# Altium PCB CSC_TEMP.PcbDoc
Units mm, origin at the board's own origin, x right, y up, seen from the top; angles counter-clockwise.
Board outline 1056.64 x 614.68 mm, 2 copper layers (Top Layer, Bottom Layer); 145 components, 556 nets, 1243 pads, 137 vias.
Unrouted connection lines stored in the file: 379.
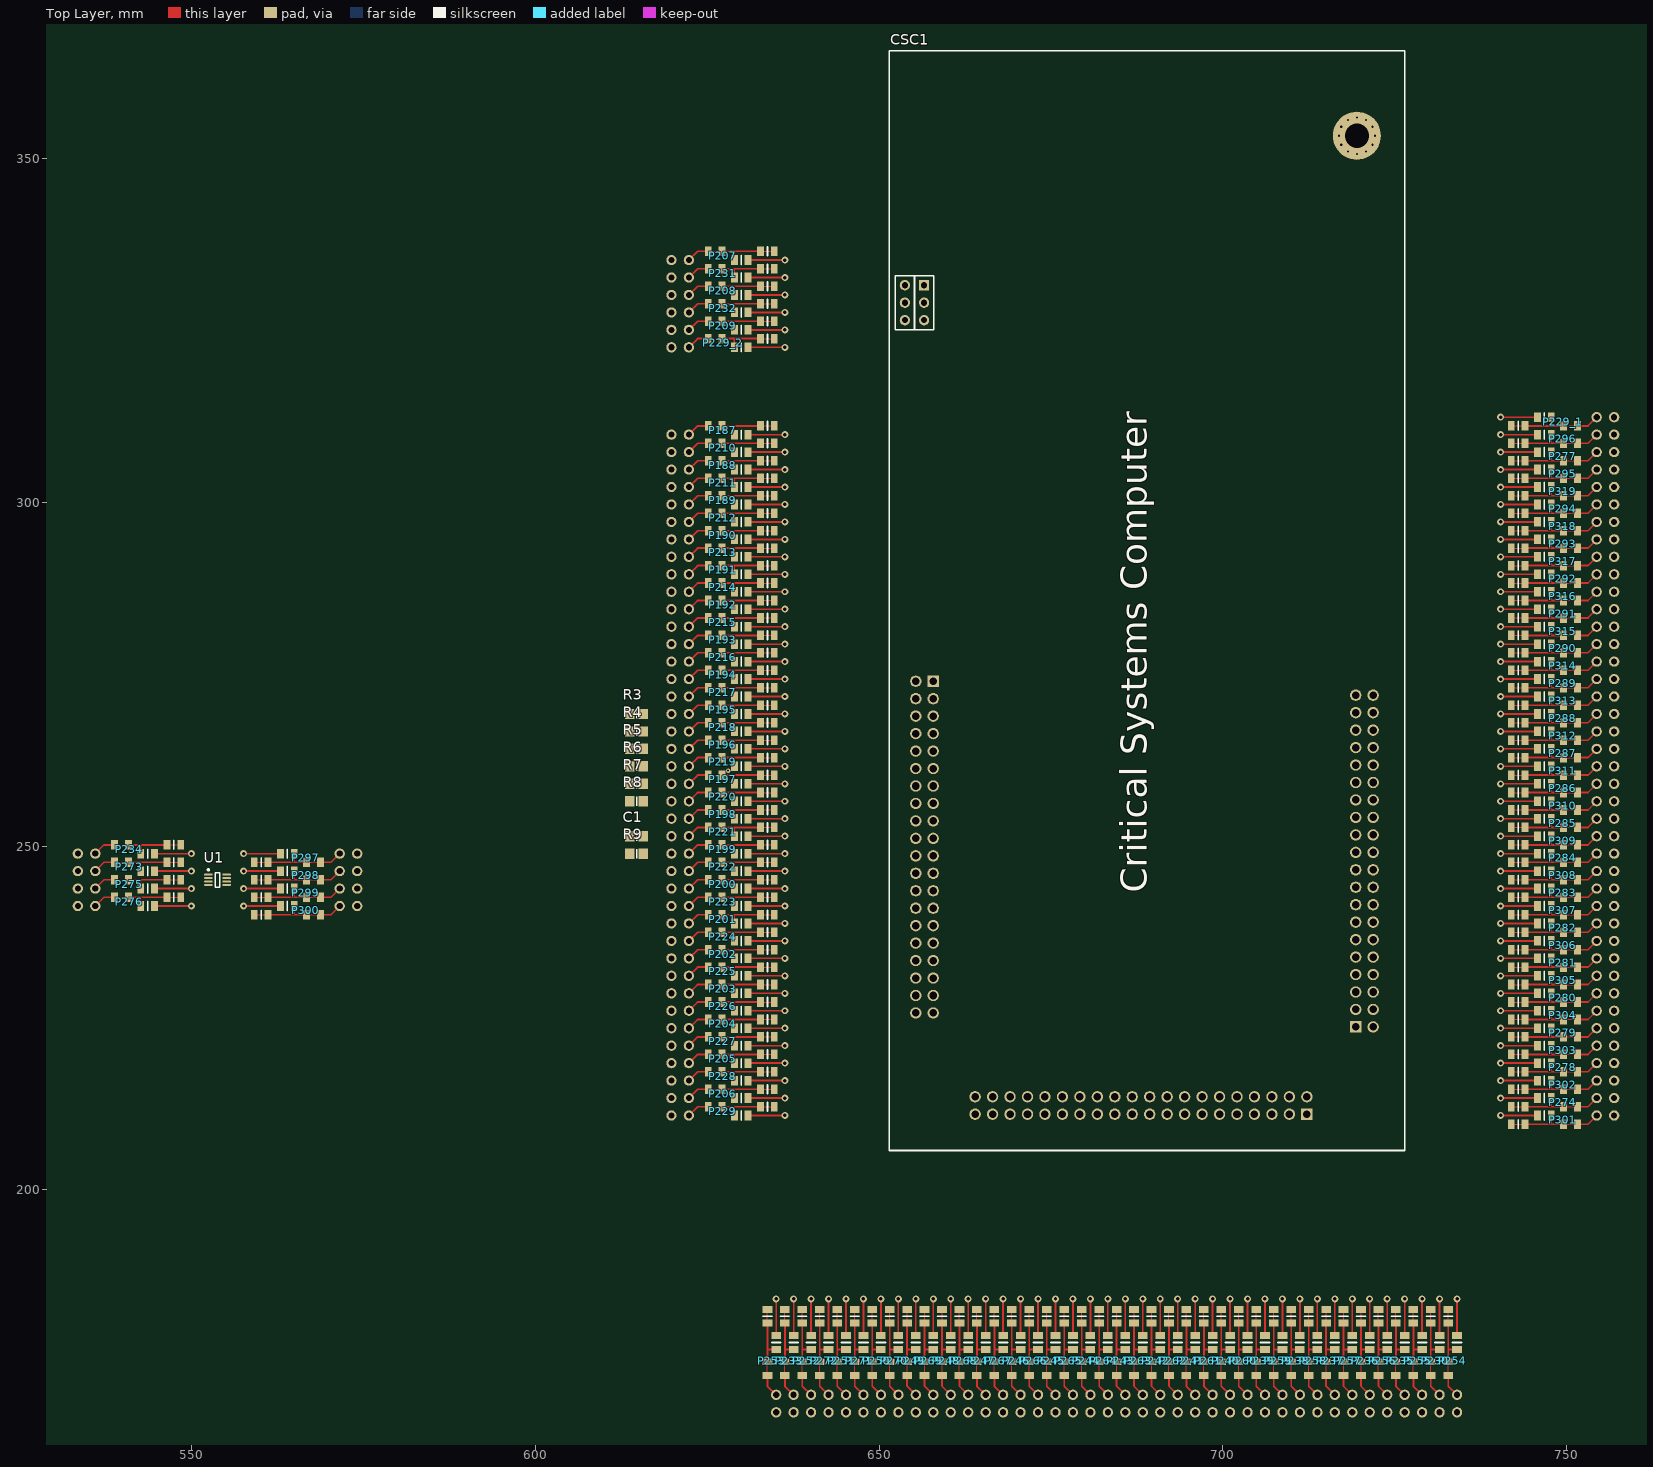
[diagram p0: Top Layer view]
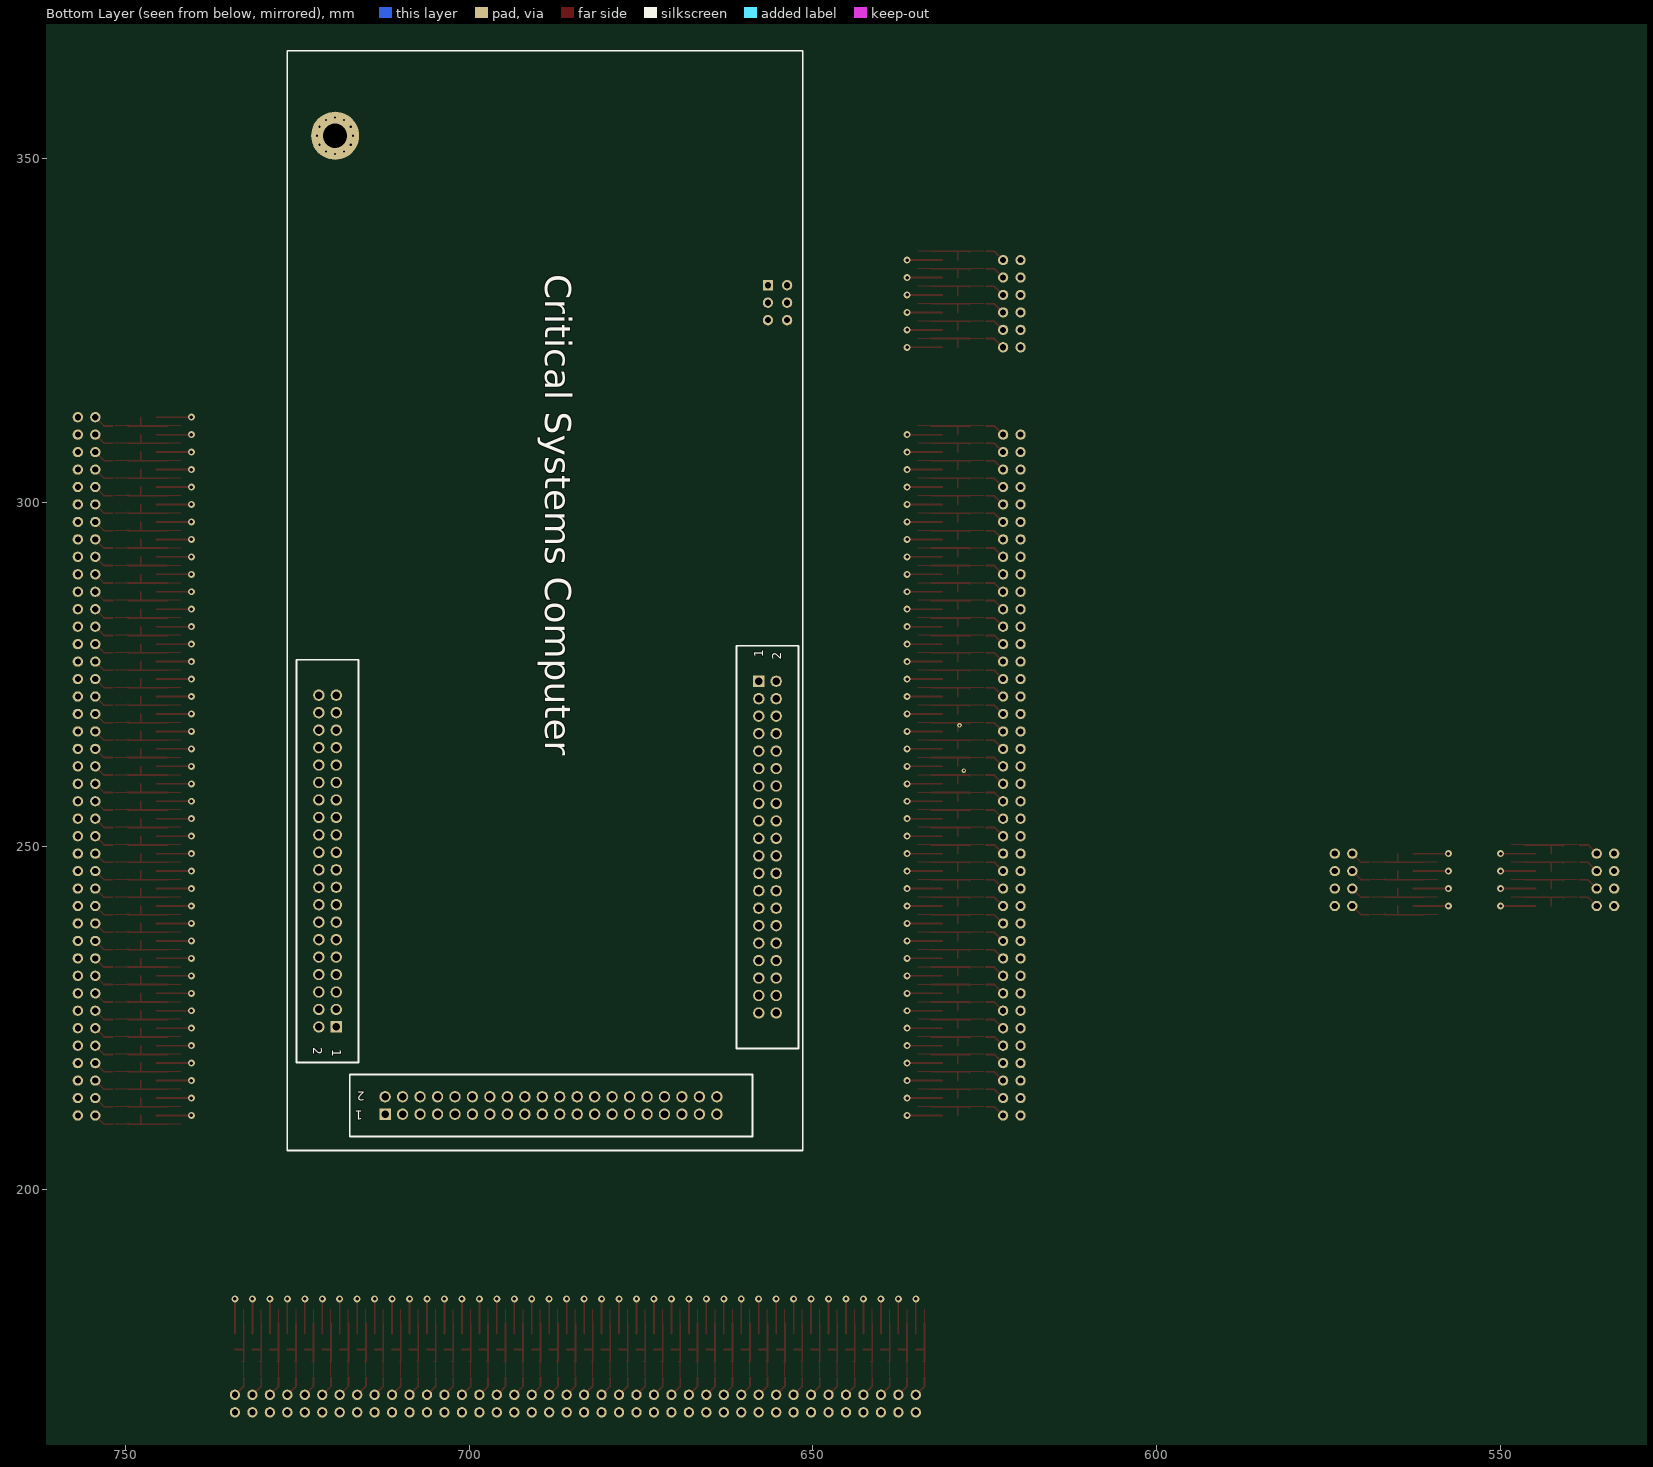
[diagram p1: Bottom Layer view, seen from below]

## Layer stack, top to bottom
Top Layer: signal copper 0.0356
Dielectric: dielectric 0.32, FR-4, Dk 4.8
Bottom Layer: signal copper 0.0356

## Board outline
0,0 0,614.68 1051.56,614.68 1056.64,609.6 1056.64,0

## Design rules (kind name [scope] priority, off if disabled: settings)
Clearance [All] p1: gap=0.152
HoleSize [All] p1: absolutevalues=TRUE maxlimit=3.5 minlimit=0.025 maxpercent=80.000 minpercent=20.000
PolygonConnect [All] p1: connectstyle=Relief reliefconductorwidth=0.254 reliefentries=4 polygonreliefangle="90 Angle"
RoomDefinition CSC [InComponentClass('CSC')] p1: confinementstyle=ConfineIn formatcopy=TRUE lockcomponents=FALSE outline 0,0 50.8,0 50.8,25.4 0,25.4
RoutingVias [All] p1: holewidth=0.711 width=1.27 viastyle="Through Hole" minholewidth=0.711 minwidth=1.27 maxholewidth=0.711 maxwidth=1.27
SilkscreenOverComponentPads [All] p1: minsilkscreentomaskgap=0.254
SolderMaskExpansion [All] p1: expansion=0.102
Width [All] p1: maxlimit=0.254 minlimit=0.254 preferedwidth=0.254
26 further rules are at their usual default settings.

## Components (designator, comment, footprint, x,y, rotation, side; value= is the part's Value field where it differs from the comment)
C1 "0805 Cap" 6-0805_M 614.68,251.46 r180 top
CSC1 "Critical Systems Computer" CSC 726.44,205.74 r90 top
P187 "Jumper_Filter" Jumper_filter 619.76,309.88 r0 top
P188 "Jumper_Filter" Jumper_filter 619.76,304.8 r0 top
P189 "Jumper_Filter" Jumper_filter 619.76,299.72 r0 top
P190 "Jumper_Filter" Jumper_filter 619.76,294.64 r0 top
P191 "Jumper_Filter" Jumper_filter 619.76,289.56 r0 top
P192 "Jumper_Filter" Jumper_filter 619.76,284.48 r0 top
P193 "Jumper_Filter" Jumper_filter 619.76,279.4 r0 top
P194 "Jumper_Filter" Jumper_filter 619.76,274.32 r0 top
P195 "Jumper_Filter" Jumper_filter 619.76,269.24 r0 top
P196 "Jumper_Filter" Jumper_filter 619.76,264.16 r0 top
P197 "Jumper_Filter" Jumper_filter 619.76,259.08 r0 top
P198 "Jumper_Filter" Jumper_filter 619.76,254 r0 top
P199 "Jumper_Filter" Jumper_filter 619.76,248.92 r0 top
P200 "Jumper_Filter" Jumper_filter 619.76,243.84 r0 top
P201 "Jumper_Filter" Jumper_filter 619.76,238.76 r0 top
P202 "Jumper_Filter" Jumper_filter 619.76,233.68 r0 top
P203 "Jumper_Filter" Jumper_filter 619.76,228.6 r0 top
P204 "Jumper_Filter" Jumper_filter 619.76,223.52 r0 top
P205 "Jumper_Filter" Jumper_filter 619.76,218.44 r0 top
P206 "Jumper_Filter" Jumper_filter 619.76,213.36 r0 top
P207 "Jumper_Filter" Jumper_filter 619.76,335.28 r0 top
P208 "Jumper_Filter" Jumper_filter 619.76,330.2 r0 top
P209 "Jumper_Filter" Jumper_filter 619.76,325.12 r0 top
P210 "Jumper_Filter" Jumper_filter 619.76,307.34 r0 top
P211 "Jumper_Filter" Jumper_filter 619.76,302.26 r0 top
P212 "Jumper_Filter" Jumper_filter 619.76,297.18 r0 top
P213 "Jumper_Filter" Jumper_filter 619.76,292.1 r0 top
P214 "Jumper_Filter" Jumper_filter 619.76,287.02 r0 top
P215 "Jumper_Filter" Jumper_filter 619.76,281.94 r0 top
P216 "Jumper_Filter" Jumper_filter 619.76,276.86 r0 top
P217 "Jumper_Filter" Jumper_filter 619.76,271.78 r0 top
P218 "Jumper_Filter" Jumper_filter 619.76,266.7 r0 top
P219 "Jumper_Filter" Jumper_filter 619.76,261.62 r0 top
P220 "Jumper_Filter" Jumper_filter 619.76,256.54 r0 top
P221 "Jumper_Filter" Jumper_filter 619.76,251.46 r0 top
P222 "Jumper_Filter" Jumper_filter 619.76,246.38 r0 top
P223 "Jumper_Filter" Jumper_filter 619.76,241.3 r0 top
P224 "Jumper_Filter" Jumper_filter 619.76,236.22 r0 top
P225 "Jumper_Filter" Jumper_filter 619.76,231.14 r0 top
P226 "Jumper_Filter" Jumper_filter 619.76,226.06 r0 top
P227 "Jumper_Filter" Jumper_filter 619.76,220.98 r0 top
P228 "Jumper_Filter" Jumper_filter 619.76,215.9 r0 top
P229 "Jumper_Filter" Jumper_filter 619.76,210.82 r0 top
P229_1 "Jumper_Filter" Jumper_filter 756.92,312.42 r180 top
P229_2 "Jumper_Filter" Jumper_filter 619.76,322.58 r0 top
P230 "Jumper_Filter" Jumper_filter 731.52,167.64 r90 top
P231 "Jumper_Filter" Jumper_filter 619.76,332.74 r0 top
P232 "Jumper_Filter" Jumper_filter 619.76,327.66 r0 top
P233 "Jumper_Filter" Jumper_filter 637.54,167.64 r90 top
P234 "Jumper_Filter" Jumper_filter 533.4,248.92 r0 top
P235 "Jumper_Filter" Jumper_filter 726.44,167.64 r90 top
P236 "Jumper_Filter" Jumper_filter 721.36,167.64 r90 top
P237 "Jumper_Filter" Jumper_filter 716.28,167.64 r90 top
P238 "Jumper_Filter" Jumper_filter 711.2,167.64 r90 top
P239 "Jumper_Filter" Jumper_filter 706.12,167.64 r90 top
P240 "Jumper_Filter" Jumper_filter 701.04,167.64 r90 top
P241 "Jumper_Filter" Jumper_filter 695.96,167.64 r90 top
P242 "Jumper_Filter" Jumper_filter 690.88,167.64 r90 top
P243 "Jumper_Filter" Jumper_filter 685.8,167.64 r90 top
P244 "Jumper_Filter" Jumper_filter 680.72,167.64 r90 top
P245 "Jumper_Filter" Jumper_filter 675.64,167.64 r90 top
P246 "Jumper_Filter" Jumper_filter 670.56,167.64 r90 top
P247 "Jumper_Filter" Jumper_filter 665.48,167.64 r90 top
P248 "Jumper_Filter" Jumper_filter 660.4,167.64 r90 top
P249 "Jumper_Filter" Jumper_filter 655.32,167.64 r90 top
P250 "Jumper_Filter" Jumper_filter 650.24,167.64 r90 top
P251 "Jumper_Filter" Jumper_filter 645.16,167.64 r90 top
P252 "Jumper_Filter" Jumper_filter 640.08,167.64 r90 top
P253 "Jumper_Filter" Jumper_filter 635,167.64 r90 top
P254 "Jumper_Filter" Jumper_filter 734.06,167.64 r90 top
P255 "Jumper_Filter" Jumper_filter 728.98,167.64 r90 top
P256 "Jumper_Filter" Jumper_filter 723.9,167.64 r90 top
P257 "Jumper_Filter" Jumper_filter 718.82,167.64 r90 top
P258 "Jumper_Filter" Jumper_filter 713.74,167.64 r90 top
P259 "Jumper_Filter" Jumper_filter 708.66,167.64 r90 top
P260 "Jumper_Filter" Jumper_filter 703.58,167.64 r90 top
P261 "Jumper_Filter" Jumper_filter 698.5,167.64 r90 top
P262 "Jumper_Filter" Jumper_filter 693.42,167.64 r90 top
P263 "Jumper_Filter" Jumper_filter 688.34,167.64 r90 top
P264 "Jumper_Filter" Jumper_filter 683.26,167.64 r90 top
P265 "Jumper_Filter" Jumper_filter 678.18,167.64 r90 top
P266 "Jumper_Filter" Jumper_filter 673.1,167.64 r90 top
P267 "Jumper_Filter" Jumper_filter 668.02,167.64 r90 top
P268 "Jumper_Filter" Jumper_filter 662.94,167.64 r90 top
P269 "Jumper_Filter" Jumper_filter 657.86,167.64 r90 top
P270 "Jumper_Filter" Jumper_filter 652.78,167.64 r90 top
P271 "Jumper_Filter" Jumper_filter 647.7,167.64 r90 top
P272 "Jumper_Filter" Jumper_filter 642.62,167.64 r90 top
P273 "Jumper_Filter" Jumper_filter 533.4,246.38 r0 top
P274 "Jumper_Filter" Jumper_filter 756.92,213.36 r180 top
P275 "Jumper_Filter" Jumper_filter 533.4,243.84 r0 top
P276 "Jumper_Filter" Jumper_filter 533.4,241.3 r0 top
P277 "Jumper_Filter" Jumper_filter 756.92,307.34 r180 top
P278 "Jumper_Filter" Jumper_filter 756.92,218.44 r180 top
P279 "Jumper_Filter" Jumper_filter 756.92,223.52 r180 top
P280 "Jumper_Filter" Jumper_filter 756.92,228.6 r180 top
P281 "Jumper_Filter" Jumper_filter 756.92,233.68 r180 top
P282 "Jumper_Filter" Jumper_filter 756.92,238.76 r180 top
P283 "Jumper_Filter" Jumper_filter 756.92,243.84 r180 top
P284 "Jumper_Filter" Jumper_filter 756.92,248.92 r180 top
P285 "Jumper_Filter" Jumper_filter 756.92,254 r180 top
P286 "Jumper_Filter" Jumper_filter 756.92,259.08 r180 top
P287 "Jumper_Filter" Jumper_filter 756.92,264.16 r180 top
P288 "Jumper_Filter" Jumper_filter 756.92,269.24 r180 top
P289 "Jumper_Filter" Jumper_filter 756.92,274.32 r180 top
P290 "Jumper_Filter" Jumper_filter 756.92,279.4 r180 top
P291 "Jumper_Filter" Jumper_filter 756.92,284.48 r180 top
P292 "Jumper_Filter" Jumper_filter 756.92,289.56 r180 top
P293 "Jumper_Filter" Jumper_filter 756.92,294.64 r180 top
P294 "Jumper_Filter" Jumper_filter 756.92,299.72 r180 top
P295 "Jumper_Filter" Jumper_filter 756.92,304.8 r180 top
P296 "Jumper_Filter" Jumper_filter 756.92,309.88 r180 top
P297 "Jumper_Filter" Jumper_filter 574.04,248.92 r180 top
P298 "Jumper_Filter" Jumper_filter 574.04,246.38 r180 top
P299 "Jumper_Filter" Jumper_filter 574.04,243.84 r180 top
P300 "Jumper_Filter" Jumper_filter 574.04,241.3 r180 top
P301 "Jumper_Filter" Jumper_filter 756.92,210.82 r180 top
P302 "Jumper_Filter" Jumper_filter 756.92,215.9 r180 top
P303 "Jumper_Filter" Jumper_filter 756.92,220.98 r180 top
P304 "Jumper_Filter" Jumper_filter 756.92,226.06 r180 top
P305 "Jumper_Filter" Jumper_filter 756.92,231.14 r180 top
P306 "Jumper_Filter" Jumper_filter 756.92,236.22 r180 top
P307 "Jumper_Filter" Jumper_filter 756.92,241.3 r180 top
P308 "Jumper_Filter" Jumper_filter 756.92,246.38 r180 top
P309 "Jumper_Filter" Jumper_filter 756.92,251.46 r180 top
P310 "Jumper_Filter" Jumper_filter 756.92,256.54 r180 top
P311 "Jumper_Filter" Jumper_filter 756.92,261.62 r180 top
P312 "Jumper_Filter" Jumper_filter 756.92,266.7 r180 top
P313 "Jumper_Filter" Jumper_filter 756.92,271.78 r180 top
P314 "Jumper_Filter" Jumper_filter 756.92,276.86 r180 top
P315 "Jumper_Filter" Jumper_filter 756.92,281.94 r180 top
P316 "Jumper_Filter" Jumper_filter 756.92,287.02 r180 top
P317 "Jumper_Filter" Jumper_filter 756.92,292.1 r180 top
P318 "Jumper_Filter" Jumper_filter 756.92,297.18 r180 top
P319 "Jumper_Filter" Jumper_filter 756.92,302.26 r180 top
R3 "1206 Resistor" 6-0805_M 614.68,269.24 r0 top
R4 "1206 Resistor" 6-0805_M 614.68,266.7 r0 top
R5 "1206 Resistor" 6-0805_M 614.68,264.16 r0 top
R6 "1206 Resistor" 6-0805_M 614.68,261.62 r0 top
R7 "1206 Resistor" 6-0805_M 614.68,259.08 r180 top
R8 "1206 Resistor" 6-0805_M 614.68,256.54 r180 top
R9 "1206 Resistor" 6-0805_M 614.68,248.92 r180 top
U1 "PCA9306" TSSOP50P310X90-8N 553.72,245.11 r0 top

## Footprints (in the part's own frame and the unit in brackets; to place one, negate y for a bottom-side part, rotate by r counter-clockwise, add the part's x,y. Pads: shape width x height; smd on the part's side, far side on the other; paste and mask are expansions set on the pad)
6-0805_M [mm] "Chip Resistor, Body 2.0x1.2mm, IPC Low Density"
  rect 1.4x1.5 smd: 1(-1,0) 2(1,0)
  silkscreen extent 0,-0.65 0,0.65, body extent -1.07,-0.7 1.07,0.7, height 0.7
CSC [mm] "Critical Systems Computer"
  rect 1.65x1.65 hole 1.1: C1_1(68.259,68.588) C2_1(5.267,14.232) C3_1(17.967,7.12)
  round 1.65 hole 1.1: C1_2(68.259,71.128) C1_3(65.719,68.588) C1_4(65.719,71.128) C1_5(63.179,68.588) C1_6(63.179,71.128) C1_7(60.639,68.588) C1_8(60.639,71.128) C1_9(58.099,68.588) C1_10(58.099,71.128) C1_11(55.559,68.588) C1_12(55.559,71.128) C1_13(53.019,68.588) C1_14(53.019,71.128) C1_15(50.479,68.588) C1_16(50.479,71.128) C1_17(47.939,68.588) C1_18(47.939,71.128) C1_19(45.399,68.588) C1_20(45.399,71.128) C1_21(42.859,68.588) C1_22(42.859,71.128) C1_23(40.319,68.588) C1_24(40.319,71.128) C1_25(37.779,68.588) C1_26(37.779,71.128) C1_27(35.239,68.588) C1_28(35.239,71.128) C1_29(32.699,68.588) C1_30(32.699,71.128) C1_31(30.159,68.588) C1_32(30.159,71.128) C1_33(27.619,68.588) C1_34(27.619,71.128) C1_35(25.079,68.588) C1_36(25.079,71.128) C1_37(22.539,68.588) C1_38(22.539,71.128) C1_39(19.999,68.588) C1_40(19.999,71.128) C2_2(7.807,14.232) C2_3(5.267,16.772) C2_4(7.807,16.772) C2_5(5.267,19.312) C2_6(7.807,19.312) C2_7(5.267,21.852) C2_8(7.807,21.852) C2_9(5.267,24.392) C2_10(7.807,24.392) C2_11(5.267,26.932) C2_12(7.807,26.932) C2_13(5.267,29.472) C2_14(7.807,29.472) C2_15(5.267,32.012) C2_16(7.807,32.012) C2_17(5.267,34.552) C2_18(7.807,34.552) C2_19(5.267,37.092) C2_20(7.807,37.092) C2_21(5.267,39.632) C2_22(7.807,39.632) C2_23(5.267,42.172) C2_24(7.807,42.172) C2_25(5.267,44.712) C2_26(7.807,44.712) C2_27(5.267,47.252) C2_28(7.807,47.252) C2_29(5.267,49.792) C2_30(7.807,49.792) C2_31(5.267,52.332) C2_32(7.807,52.332) C2_33(5.267,54.872) C2_34(7.807,54.872) C2_35(5.267,57.412) C2_36(7.807,57.412) C2_37(5.267,59.952) C2_38(7.807,59.952) C2_39(5.267,62.492) C2_40(7.807,62.492) C3_2(17.967,4.58) C3_3(20.507,7.12) C3_4(20.507,4.58) C3_5(23.047,7.12) C3_6(23.047,4.58) C3_7(25.587,7.12) C3_8(25.587,4.58) C3_9(28.127,7.12) C3_10(28.127,4.58) C3_11(30.667,7.12) C3_12(30.667,4.58) C3_13(33.207,7.12) C3_14(33.207,4.58) C3_15(35.747,7.12) C3_16(35.747,4.58) C3_17(38.287,7.12) C3_18(38.287,4.58) C3_19(40.827,7.12) C3_20(40.827,4.58) C3_21(43.367,7.12) C3_22(43.367,4.58) C3_23(45.907,7.12) C3_24(45.907,4.58) C3_25(48.447,7.12) C3_26(48.447,4.58) C3_27(50.987,7.12) C3_28(50.987,4.58) C3_29(53.527,7.12) C3_30(53.527,4.58) C3_31(56.067,7.12) C3_32(56.067,4.58) C3_33(58.607,7.12) C3_34(58.607,4.58) C3_35(61.147,7.12) C3_36(61.147,4.58) C3_37(63.687,7.12) C3_38(63.687,4.58) C3_39(66.227,7.12) C3_40(66.227,4.58)
  round 1 hole 0.3: GND(145,6.95) GND(145.352,5.638) GND(145.352,8.262) GND(146.313,9.223) GND(146.313,4.677) GND(147.625,4.325) GND(147.625,9.575) GND(148.937,4.677) GND(148.937,9.223) GND(149.898,5.638) GND(149.898,8.262) GND(150.25,6.95)
  round 7 hole 3.5: GND(147.625,6.95)
  rect 1.5x1.5 hole 0.9: ISP1(125.877,69.923)
  round 1.5 hole 0.9: ISP2(123.337,69.923) ISP3(120.797,69.923) ISP4(125.877,72.713) ISP5(123.337,72.713) ISP6(120.797,72.713)
  silkscreen extent 0,0 160,75
Jumper_filter [mm] "Connector; Header; 2 Position"
  round 1.5 hole 0.9: 1(0,0) 2(2.54,0)
  rect 1x1.4 smd: 2(5.35,1.27) 2(7.35,1.27) 2(9.16,0) 2(12.97,1.27) 2(14.97,1.27) 3(11.16,0)
  Top Layer lines w0.152: 5.334,1.27 14.986,1.27 ; 7.366,1.016 7.366,1.27
  Top Layer lines w0.254: 2.54,0 3.81,1.27 5.08,1.27 ; 7.366,1.27 12.954,1.27 ; 9.144,0 9.144,1.27 ; 11.43,0 16.51,0
  silkscreen extent 10.16,-0.65 13.97,1.92, body extent 5.25,-0.65 15.07,1.92, height 0.5
TSSOP50P310X90-8N [mm] "TSSOP, 8-Leads, Body 2.1x2.4mm (max), Pitch 0.50mm, IPC Medium Density"
  oval 1.25x0.3 smd mask+0.102: 1(-1.325,0.75) 2(-1.325,0.25)
  oval 1.25x0.3 smd: 3(-1.325,-0.25) 4(-1.325,-0.75) 5(1.325,-0.75) 6(1.325,-0.25) 7(1.325,0.25) 8(1.325,0.75)
  silkscreen extent -1.45,-1.05 0.3,1.57, body extent -1.2,-1.05 1.2,1.05, height 0.9

## Part data
C1: library part "0805 MLCC - X7R, 10%", "0805 MLCC - X7R, 10%"
CSC1: library part CSC
R3 R4 R5 R6 R7 R8 R9: library part "1206 Thick Film Resistor 1%", "1206 Thick Film Resistor 1%"

## Via types
v1: diameter 1.016, hole 0.508, Top Layer to Bottom Layer, 135 vias
v2: diameter 0.7, hole 0.3, Top Layer to Bottom Layer, tented both sides, 2 vias

## Nets (pads, with @x,y where several pads share a name; then routed paths per layer and width w, separated by ;. In a path a pad name is that pad's centre, name@x,y a point inside that pad or via, vN(x,y) a via of type N, cw(c..) or ccw(c..) an arc to the next point about the centre after c; other vN are vias at no path point)
3V3_AUX: 
3V3_AUX_E\N\: 
3V3_BBONE: 
3V3_COMMS: 
3V3_CSC: P187.1 P207.1 P230.1 P273.1 P274.1 R5.1 R6.1
3V3_PWR: R3.1 R4.1
3V3_UNREG: 
5V0_AUX: 
5V0_AUX_E\N\: 
5V0_BBONE: 
5V0_BCR: 
5V0_TELEM: R7.1 R8.1 R9.1
5V0_UNREG: 
8V0_RX1: 
8V0_RX2: 
AFSK1_DET: P203.1
AFSK1_M0: P256.1
AFSK1_M1: P237.1
AFSK1_RX: P238.1
AFSK1_RXD: 
AFSK1_TX: P257.1
AFSK1_TXD: 
AFSK2_DET: P199.1
AFSK2_M0: P226.1
AFSK2_M1: P204.1
AFSK2_RX: P239.1
AFSK2_RXD: 
AFSK2_TX: P258.1
AFSK2_TXD: 
BBONE_E\N\: 
BBONE_I2C2_SCL: 
BBONE_I2C2_SDA: 
BCR_E\N\: 
BCR_MISO: P221.1
BCR_MOSI: P222.1
BCR_R\S\T\: P197.1
BCR_SCK: P220.1
COMMS_E\N\: 
CSC_E\N\: 
CSC_ISP: P232.1
CSC_RST: P209.1
DTMF1Q1: P212.1
DTMF1Q2: P190.1
DTMF1Q3: P213.1
DTMF1Q4: P191.1
DTMF1ST: P214.1
DTMF2Q1: P192.1
DTMF2Q2: P215.1
DTMF2Q3: P193.1
DTMF2Q4: P216.1
DTMF2ST: P194.1
GND: C1.1 P187.3 P188.3 P189.3 P190.3 P191.3 P192.3 P193.3 P194.3 P195.3 P196.3 P197.3 P198.3 P199.3 P200.3 P201.3 P202.3 P203.3 P204.3 P205.3 P206.3 P207.3 P208.3 P209.3 P210.3 P211.3 P212.3 P213.3 P214.3 P215.3 P216.3 P217.3 P218.3 P219.3 P220.3 P221.3 P222.3 P223.3 P224.3 P225.3 P226.3 P227.3 P228.3 P229.1 P229.3 P229_1.1 P229_1.3 P229_2.1 P229_2.3 P230.3 P231.3 P232.3 P233.1 P233.3 P234.1 P234.3 P235.3 P236.3 P237.3 P238.3 P239.3 P240.3 P241.3 P242.3 P243.3 P244.3 P245.3 P246.3 P247.3 P248.3 P249.3 P250.3 P251.3 P252.3 P253.3 P254.3 P255.3 P256.3 P257.3 P258.3 P259.3 P260.3 P261.3 P262.3 P263.3 P264.3 P265.3 P266.3 P267.3 P268.3 P269.3 P270.3 P271.3 P272.3 P273.3 P274.3 P275.3 P276.3 P277.1 P277.3 P278.3 P279.3 P280.3 P281.3 P282.3 P283.3 P284.3 P285.3 P286.3 P287.3 P288.3 P289.3 P290.3 P291.3 P292.3 P293.3 P294.3 P295.3 P296.3 P297.3 P298.3 P299.3 P300.3 P301.3 P302.3 P303.3 P304.3 P305.3 P306.3 P307.3 P308.3 P309.3 P310.3 P311.3 P312.3 P313.3 P314.3 P315.3 P316.3 P317.3 P318.3 P319.3
  other v1: 635,184.15 637.54,184.15 640.08,184.15 642.62,184.15 645.16,184.15 647.7,184.15 650.24,184.15 652.78,184.15 655.32,184.15 657.86,184.15 660.4,184.15 662.94,184.15 665.48,184.15 668.02,184.15 670.56,184.15 673.1,184.15 678.18,184.15 680.72,184.15 683.26,184.15 685.8,184.15 688.34,184.15 695.96,184.15 698.5,184.15 701.04,184.15 703.58,184.15 706.12,184.15 708.66,184.15 713.74,184.15 716.28,184.15 718.82,184.15 721.36,184.15 723.9,184.15 726.44,184.15 728.98,184.15 731.52,184.15 734.06,184.15 636.27,210.82 740.41,210.82 636.27,213.36 740.41,213.36 636.27,215.9 740.41,215.9 636.27,218.44 740.41,218.44 636.27,220.98 740.41,220.98 636.27,223.52 740.41,223.52 636.27,226.06 740.41,226.06 636.27,228.6 740.41,228.6 636.27,231.14 740.41,231.14 636.27,233.68 740.41,233.68 636.27,236.22 740.41,236.22 636.27,238.76 740.41,238.76 549.91,241.3 557.53,241.3 636.27,241.3 740.41,241.3 549.91,243.84 557.53,243.84 636.27,243.84 740.41,243.84 549.91,246.38 557.53,246.38 636.27,246.38 740.41,246.38 549.91,248.92 557.53,248.92 636.27,248.92 740.41,248.92 636.27,251.46 740.41,251.46 636.27,254 740.41,254 636.27,256.54 740.41,256.54 636.27,259.08 740.41,259.08 636.27,261.62 740.41,261.62 636.27,264.16 740.41,264.16 636.27,266.7 740.41,266.7 636.27,269.24 740.41,269.24 636.27,271.78 740.41,271.78 636.27,274.32 740.41,274.32 636.27,276.86 740.41,276.86 636.27,279.4 740.41,279.4 636.27,281.94 740.41,281.94 636.27,284.48 740.41,284.48 636.27,287.02 740.41,287.02 636.27,289.56 740.41,289.56 636.27,292.1 740.41,292.1 636.27,294.64 740.41,294.64 636.27,297.18 740.41,297.18 636.27,299.72 740.41,299.72 636.27,302.26 740.41,302.26 636.27,304.8 740.41,304.8 636.27,307.34 740.41,307.34 636.27,309.88 740.41,309.88 740.41,312.42 636.27,325.12 636.27,327.66 636.27,330.2 636.27,332.74 636.27,335.28
  other v2: 628.015,260.985
I2C0_SCL: P188.1 R4.2
I2C0_SDA: P210.1 R3.2
I2C1_SCL: P195.1
I2C1_SDA: P217.1
I2C2_SCL: P218.1 P275.1 R6.2
I2C2_SCL_5V: P299.1 R8.2
I2C2_SDA: P235.1 P276.1 R5.2
I2C2_SDA_5V: P300.1 R7.2
NetBBONE1_A01: 
NetBBONE1_A02: 
NetBBONE1_A03: 
NetBBONE1_A04: 
NetBBONE1_A05: 
NetBBONE1_A06: 
NetBBONE1_A07: 
NetBBONE1_A08: 
NetBBONE1_A09: 
NetBBONE1_A10: 
NetBBONE1_A11: 
NetBBONE1_A12: 
NetBBONE1_A13: 
NetBBONE1_A14: 
NetBBONE1_A15: 
NetBBONE1_A16: 
NetBBONE1_A17: 
NetBBONE1_A18: 
NetBBONE1_A19: 
NetBBONE1_A20: 
NetBBONE1_A21: 
NetBBONE1_A22: 
NetBBONE1_A23: 
NetBBONE1_A24: 
NetBBONE1_A25: 
NetBBONE1_A26: 
NetBBONE1_A27: 
NetBBONE1_A28: 
NetBBONE1_A29: 
NetBBONE1_A30: 
NetBBONE1_A31: 
NetBBONE1_A32: 
NetBBONE1_A33: 
NetBBONE1_A34: 
NetBBONE1_A35: 
NetBBONE1_A36: 
NetBBONE1_A37: 
NetBBONE1_A38: 
NetBBONE1_A39: 
NetBBONE1_A40: 
NetBBONE1_A41: 
NetBBONE1_A42: 
NetBBONE1_A43: 
NetBBONE1_A44: 
NetBBONE1_A45: 
NetBBONE1_A46: 
NetBBONE1_B01: 
NetBBONE1_B02: 
NetBBONE1_B03: 
NetBBONE1_B04: 
NetBBONE1_B05: 
NetBBONE1_B06: 
NetBBONE1_B07: 
NetBBONE1_B08: 
NetBBONE1_B09: 
NetBBONE1_B10: 
NetBBONE1_B11: 
NetBBONE1_B12: 
NetBBONE1_B13: 
NetBBONE1_B14: 
NetBBONE1_B15: 
NetBBONE1_B16: 
NetBBONE1_B17: 
NetBBONE1_B18: 
NetBBONE1_B19: 
NetBBONE1_B20: 
NetBBONE1_B21: 
NetBBONE1_B22: 
NetBBONE1_B23: 
NetBBONE1_B24: 
NetBBONE1_B25: 
NetBBONE1_B26: 
NetBBONE1_B27: 
NetBBONE1_B28: 
NetBBONE1_B29: 
NetBBONE1_B30: 
NetBBONE1_B31: 
NetBBONE1_B32: 
NetBBONE1_B33: 
NetBBONE1_B34: 
NetBBONE1_B35: 
NetBBONE1_B36: 
NetBBONE1_B37: 
NetBBONE1_B38: 
NetBBONE1_B39: 
NetBBONE1_B40: 
NetBBONE1_B41: 
NetBBONE1_B42: 
NetBBONE1_B43: 
NetBBONE1_B44: 
NetBBONE1_B45: 
NetBBONE1_B46: 
NetBBONE1_P01: 
NetBBONE1_P02: 
NetBBONE1_P03: 
NetBBONE1_P04: 
NetBBONE1_P05: 
NetBBONE1_P06: 
NetBBONE1_P07: 
NetBBONE1_P08: 
NetBBONE1_P09: 
NetBBONE1_P10: 
NetBCR1_1: 
NetBCR1_2: 
NetBCR1_3: 
NetBCR1_4: 
NetBCR1_5: 
NetBCR1_6: 
NetBCR1_7: 
NetBCR1_8: 
NetBCR1_9: 
NetBCR1_10: 
NetBCR1_11: 
NetBCR1_12: 
NetBCR1_13: 
NetBCR1_14: 
NetBCR1_15: 
NetBCR1_16: 
NetBCR1_17: 
NetBCR1_18: 
NetBCR1_19: 
NetBCR1_20: 
NetBCR1_21: 
NetBCR1_22: 
NetBCR1_23: 
NetBCR1_24: 
NetBCR1_25: 
NetBCR1_26: 
NetBCR1_27: 
NetBCR1_28: 
NetBCR1_29: 
NetBCR1_30: 
NetBCR1_31: 
NetBCR1_32: 
NetBCR1_33: 
NetBCR1_34: 
NetBCR1_35: 
NetC1_2: C1.2 P297.1 P298.1 R9.2
NetCOMMS1_AFSK1_M0: 
NetCOMMS1_AFSK1_M1: 
NetCOMMS1_AFSK1_RXD: 
NetCOMMS1_AFSK1_TXD: 
NetCOMMS1_AFSK2_M0: 
NetCOMMS1_AFSK2_M1: 
NetCOMMS1_AFSK2_RXD: 
NetCOMMS1_AFSK2_TXD: 
NetCOMMS1_DTMF1_ES: 
NetCOMMS1_DTMF1_Q1: 
NetCOMMS1_DTMF1_Q2: 
NetCOMMS1_DTMF1_Q3: 
NetCOMMS1_DTMF1_Q4: 
NetCOMMS1_DTMF1_ST: 
NetCOMMS1_DTMF2_ES: 
NetCOMMS1_DTMF2_Q1: 
NetCOMMS1_DTMF2_Q2: 
NetCOMMS1_DTMF2_Q3: 
NetCOMMS1_DTMF2_Q4: 
NetCOMMS1_DTMF2_ST: 
NetCOMMS1_GMSK_RX1: 
NetCOMMS1_GMSK_RX2: 
NetCOMMS1_GMSK_TX1: 
NetCOMMS1_GMSK_TX2: 
NetCOMMS1_GND: 
NetCOMMS1_RX1: 
NetCOMMS1_RX2: 
NetCOMMS1_S0: 
NetCOMMS1_S1: 
NetCOMMS1_S2: 
NetCOMMS1_S3: 
NetCOMMS1_S4: 
NetCOMMS1_S5: 
NetCOMMS1_S6: 
NetCOMMS1_S7: 
NetCOMMS1_TX1: 
NetCOMMS1_TX2: 
NetCOMMS1_VCC: 
NetCSC1_C1_1: CSC1.C1_1 P187.2@622.3,309.88
NetCSC1_C1_2: CSC1.C1_2 P210.2
NetCSC1_C1_3: CSC1.C1_3 P188.2@622.3,304.8
NetCSC1_C1_4: CSC1.C1_4 P211.2
NetCSC1_C1_5: CSC1.C1_5 P189.2@622.3,299.72
NetCSC1_C1_6: CSC1.C1_6 P212.2
NetCSC1_C1_7: CSC1.C1_7 P190.2
NetCSC1_C1_8: CSC1.C1_8 P213.2
NetCSC1_C1_9: CSC1.C1_9 P191.2
NetCSC1_C1_10: CSC1.C1_10 P214.2
NetCSC1_C1_11: CSC1.C1_11 P192.2
NetCSC1_C1_12: CSC1.C1_12 P215.2
NetCSC1_C1_13: CSC1.C1_13 P193.2
NetCSC1_C1_14: CSC1.C1_14 P216.2
NetCSC1_C1_15: CSC1.C1_15 P194.2
NetCSC1_C1_16: CSC1.C1_16 P217.2
NetCSC1_C1_17: CSC1.C1_17 P195.2@622.3,269.24
NetCSC1_C1_18: CSC1.C1_18 P218.2
  other v2: 628.65,267.589
NetCSC1_C1_19: CSC1.C1_19 P196.2@622.3,264.16
NetCSC1_C1_20: CSC1.C1_20 P219.2
NetCSC1_C1_21: CSC1.C1_21 P197.2@622.3,259.08
NetCSC1_C1_22: CSC1.C1_22 P220.2
NetCSC1_C1_23: CSC1.C1_23 P198.2@622.3,254
NetCSC1_C1_24: CSC1.C1_24 P221.2
NetCSC1_C1_25: CSC1.C1_25 P199.2
NetCSC1_C1_26: CSC1.C1_26 P222.2
NetCSC1_C1_27: CSC1.C1_27 P200.2@622.3,243.84
NetCSC1_C1_28: CSC1.C1_28 P223.2
NetCSC1_C1_29: CSC1.C1_29 P201.2@622.3,238.76
NetCSC1_C1_30: CSC1.C1_30 P224.2
NetCSC1_C1_31: CSC1.C1_31 P202.2@622.3,233.68
NetCSC1_C1_32: CSC1.C1_32 P225.2
NetCSC1_C1_33: CSC1.C1_33 P203.2
NetCSC1_C1_34: CSC1.C1_34 P226.2
NetCSC1_C1_35: CSC1.C1_35 P204.2@622.3,223.52
NetCSC1_C1_36: CSC1.C1_36 P227.2
NetCSC1_C1_37: CSC1.C1_37 P205.2@622.3,218.44
NetCSC1_C1_38: CSC1.C1_38 P228.2
NetCSC1_C1_39: CSC1.C1_39 P206.2@622.3,213.36
NetCSC1_C1_40: CSC1.C1_40 P229.2
NetCSC1_C2_1: CSC1.C2_1 P230.2
NetCSC1_C2_2: CSC1.C2_2 P254.2
NetCSC1_C2_3: CSC1.C2_3 P235.2@726.44,170.18
NetCSC1_C2_4: CSC1.C2_4 P255.2
NetCSC1_C2_5: CSC1.C2_5 P236.2@721.36,170.18
NetCSC1_C2_6: CSC1.C2_6 P256.2
NetCSC1_C2_7: CSC1.C2_7 P237.2@716.28,170.18
NetCSC1_C2_8: CSC1.C2_8 P257.2
NetCSC1_C2_9: CSC1.C2_9 P238.2
  other v1: 711.2,184.15
NetCSC1_C2_10: CSC1.C2_10 P258.2
NetCSC1_C2_11: CSC1.C2_11 P239.2
NetCSC1_C2_12: CSC1.C2_12 P259.2
NetCSC1_C2_13: CSC1.C2_13 P240.2@701.04,170.18
NetCSC1_C2_14: CSC1.C2_14 P260.2
NetCSC1_C2_15: CSC1.C2_15 P241.2@695.96,170.18
NetCSC1_C2_16: CSC1.C2_16 P261.2
NetCSC1_C2_17: CSC1.C2_17 P242.2@690.88,170.18
NetCSC1_C2_18: CSC1.C2_18 P262.2
  other v1: 693.42,184.15
NetCSC1_C2_19: CSC1.C2_19 P243.2@685.8,170.18
NetCSC1_C2_20: CSC1.C2_20 P263.2
NetCSC1_C2_21: CSC1.C2_21 P244.2@680.72,170.18
NetCSC1_C2_22: CSC1.C2_22 P264.2
NetCSC1_C2_23: CSC1.C2_23 P245.2@675.64,170.18
  other v1: 675.64,184.15
NetCSC1_C2_24: CSC1.C2_24 P265.2
NetCSC1_C2_25: CSC1.C2_25 P246.2@670.56,170.18
NetCSC1_C2_26: CSC1.C2_26 P266.2
NetCSC1_C2_27: CSC1.C2_27 P247.2@665.48,170.18
NetCSC1_C2_28: CSC1.C2_28 P267.2
NetCSC1_C2_29: CSC1.C2_29 P248.2@660.4,170.18
NetCSC1_C2_30: CSC1.C2_30 P268.2
NetCSC1_C2_31: CSC1.C2_31 P249.2@655.32,170.18
NetCSC1_C2_32: CSC1.C2_32 P269.2
NetCSC1_C2_33: CSC1.C2_33 P250.2@650.24,170.18
NetCSC1_C2_34: CSC1.C2_34 P270.2
NetCSC1_C2_35: CSC1.C2_35 P251.2@645.16,170.18
NetCSC1_C2_36: CSC1.C2_36 P271.2
NetCSC1_C2_37: CSC1.C2_37 P252.2@640.08,170.18
NetCSC1_C2_38: CSC1.C2_38 P272.2
NetCSC1_C2_39: CSC1.C2_39 P253.2@635,170.18
NetCSC1_C2_40: CSC1.C2_40 P233.2
NetCSC1_C3_1: CSC1.C3_1 P274.2
NetCSC1_C3_2: CSC1.C3_2 P301.2
NetCSC1_C3_3: CSC1.C3_3 P278.2@754.38,218.44
NetCSC1_C3_4: CSC1.C3_4 P302.2
NetCSC1_C3_5: CSC1.C3_5 P279.2@754.38,223.52
NetCSC1_C3_6: CSC1.C3_6 P303.2
NetCSC1_C3_7: CSC1.C3_7 P280.2@754.38,228.6
NetCSC1_C3_8: CSC1.C3_8 P304.2
NetCSC1_C3_9: CSC1.C3_9 P281.2@754.38,233.68
NetCSC1_C3_10: CSC1.C3_10 P305.2
NetCSC1_C3_11: CSC1.C3_11 P282.2@754.38,238.76
NetCSC1_C3_12: CSC1.C3_12 P306.2
NetCSC1_C3_13: CSC1.C3_13 P283.2@754.38,243.84
NetCSC1_C3_14: CSC1.C3_14 P307.2
NetCSC1_C3_15: CSC1.C3_15 P284.2@754.38,248.92
NetCSC1_C3_16: CSC1.C3_16 P308.2
NetCSC1_C3_17: CSC1.C3_17 P285.2@754.38,254
NetCSC1_C3_18: CSC1.C3_18 P309.2
NetCSC1_C3_19: CSC1.C3_19 P286.2@754.38,259.08
NetCSC1_C3_20: CSC1.C3_20 P310.2
NetCSC1_C3_21: CSC1.C3_21 P287.2@754.38,264.16
NetCSC1_C3_22: CSC1.C3_22 P311.2
NetCSC1_C3_23: CSC1.C3_23 P288.2@754.38,269.24
NetCSC1_C3_24: CSC1.C3_24 P312.2
NetCSC1_C3_25: CSC1.C3_25 P289.2@754.38,274.32
NetCSC1_C3_26: CSC1.C3_26 P313.2
NetCSC1_C3_27: CSC1.C3_27 P290.2@754.38,279.4
NetCSC1_C3_28: CSC1.C3_28 P314.2
NetCSC1_C3_29: CSC1.C3_29 P291.2@754.38,284.48
NetCSC1_C3_30: CSC1.C3_30 P315.2
NetCSC1_C3_31: CSC1.C3_31 P292.2@754.38,289.56
NetCSC1_C3_32: CSC1.C3_32 P316.2
NetCSC1_C3_33: CSC1.C3_33 P293.2@754.38,294.64
NetCSC1_C3_34: CSC1.C3_34 P317.2
NetCSC1_C3_35: CSC1.C3_35 P294.2@754.38,299.72
NetCSC1_C3_36: CSC1.C3_36 P318.2
NetCSC1_C3_37: CSC1.C3_37 P295.2@754.38,304.8
NetCSC1_C3_38: CSC1.C3_38 P319.2
NetCSC1_C3_39: CSC1.C3_39 P296.2@754.38,309.88
NetCSC1_C3_40: CSC1.C3_40 P277.2
NetCSC1_GND: CSC1.GND P229_1.2
NetCSC1_ISP1: CSC1.ISP1 P207.2@622.3,335.28
NetCSC1_ISP2: CSC1.ISP2 P208.2
NetCSC1_ISP3: CSC1.ISP3 P209.2
NetCSC1_ISP4: CSC1.ISP4 P231.2
NetCSC1_ISP5: CSC1.ISP5 P232.2
NetCSC1_ISP6: CSC1.ISP6 P229_2.2
  other v1: 636.27,322.58
NetD1_1: 
NetF50_2: 
NetF51_2: 
NetF52_2: 
NetF53_2: 
NetF54_2: 
NetF55_2: 
NetF56_2: 
NetF57_2: 
NetF58_2: 
NetF59_1: 
NetF60_1: 
NetF61_2: 
NetF62_2: 
NetF93_1: 
NetF95_1: 
NetF97_1: 
NetF100_1: 
NetF102_1: 
NetF104_1: 
NetF110_1: 
NetF110_2: 
NetF111_1: 
NetF111_2: 
NetF116_1: 
NetF116_2: 
NetF117_1: 
NetF117_2: 
NetGMSK1_1A: 
NetGMSK1_1B: 
NetGMSK1_1C: 
NetGMSK1_2A: 
NetGMSK1_2B: 
NetGMSK1_2C: 
NetGMSK1_3A: 
NetGMSK1_3B: 
NetGMSK1_3C: 
NetGMSK1_4A: 
NetGMSK1_4B: 
NetGMSK1_5A: 
NetGMSK1_5B: 
NetGMSK1_5C: 
NetGMSK1_6A: 
NetGMSK1_6B: 
NetGMSK1_7A: 
NetGMSK1_7B: 
NetGMSK1_7C: 
NetGMSK1_8A: 
NetGMSK1_8B: 
NetGMSK1_8C: 
NetGMSK1_9A: 
NetGMSK1_9B: 
NetGMSK1_10A: 
NetGMSK1_10B: 
NetGMSK1_12A: 
NetGMSK1_12B: 
NetJ15_1: 
NetJ15_2: 
NetJ15_3: 
NetJ15_4: 
NetJ15_5: 
NetJ15_6: 
NetJ15_7: 
NetJ15_8: 
NetJ15_9: 
NetJ16_1: 
NetJ16_2: 
NetJ16_3: 
NetJ16_4: 
NetJ16_5: 
NetJ16_6: 
NetJ16_7: 
NetJ16_8: 
NetJ16_9: 
NetJ25_2: 
NetJ26_2: 
NetLDO1_EN1: 
NetLDO1_EN2: 
NetLDO1_EN3: 
NetLDO1_EN4: 
NetLDO1_GND: 
NetLDO1_RST1: 
NetLDO1_RST2: 
NetLDO1_RST3: 
NetLDO1_RST4: 
NetLDO1_VIN: 
NetLDO1_VOUT1: 
NetLDO1_VOUT2: 
NetLDO1_VOUT3: 
NetLDO1_VOUT4: 
NetLDO2_EN1: 
NetLDO2_EN2: 
NetLDO2_EN3: 
NetLDO2_EN4: 
NetLDO2_GND: 
NetLDO2_RST1: 
NetLDO2_RST2: 
NetLDO2_RST3: 
NetLDO2_RST4: 
NetLDO2_VIN: 
NetLDO2_VOUT1: 
NetLDO2_VOUT2: 
NetLDO2_VOUT3: 
NetLDO2_VOUT4: 
NetP234_2: P234.2 U1.1
NetP273_2: P273.2 U1.2
NetP275_2: P275.2@535.94,243.84 U1.3
NetP276_2: P276.2@535.94,241.3 U1.4
NetP297_2: P297.2 U1.8
NetP298_2: P298.2 U1.7
NetP299_2: P299.2 U1.6
NetP300_2: P300.2 U1.5
NetP356_2: 
NetP357_2: 
NetP358_2: 
NetP359_2: 
NetP360_2: 
NetP361_2: 
NetP362_2: 
NetP363_2: 
NetP365_2: 
NetP366_2: 
NetP368_2: 
NetP369_2: 
NetP370_2: 
NetP371_2: 
NetP372_1_2: 
NetP372_99_2: 
NetP373_2: 
NetP375_1_2: 
NetP377_1: 
NetP378_1: 
NetP380_1: 
NetP381_1: 
PLLACQ1: 
PLLACQ2: 
PWR_E\N\: 
RX1_AF: 
RX1_GMSK: 
RX2_AF: 
RX2_GMSK: 
RX_PSAVE1: 
RX_PSAVE2: 
RX_S/N1: 
RX_S/N2: 
RXACQ1: 
RXACQ2: 
RXCLK1: 
RXCLK2: 
RXDATA1: 
RXDATA2: 
RXHOLD1: 
RXHOLD2: 
S0: P263.1
S1: P244.1
S2: P264.1
S3: P245.1
S4: P265.1
S5: P246.1
S6: P266.1
S7: P247.1
SOLA_X+_T: 
SOLA_X+_V: 
SOLA_X-_T: 
SOLA_X-_V: 
SOLA_Y+_T: 
SOLA_Y+_V: 
SOLA_Y-_T: 
SOLA_Y-_V: 
SOLA_Z+_T: 
SOLA_Z+_V: 
SOLA_Z-_T: 
SOLA_Z-_V: 
TBATT: 
TELEM_E\N\: 
TX1_AF: 
TX1_GMSK: 
TX2_AF: 
TX2_GMSK: 
TX_PSAVE1: 
TX_PSAVE2: 
TXCLK1: 
TXCLK2: 
TXDATA1: 
TXDATA2: 
TXEN1: 
TXEN2: 
UART0_RX: P208.1
UART0_TX: P231.1
V_BATT: 
V_LOAD: 
VVAR_TX1: 
VVAR_TX2: 
pads on no net: P187.2@625.11,311.15 P187.2@627.11,311.15 P187.2@628.92,309.88 P187.2@632.73,311.15 P187.2@634.73,311.15 P188.2@625.11,306.07 P188.2@627.11,306.07 P188.2@628.92,304.8 P188.2@632.73,306.07 P188.2@634.73,306.07 P189.1 P189.2@625.11,300.99 P189.2@627.11,300.99 P189.2@628.92,299.72 P189.2@632.73,300.99 P189.2@634.73,300.99 P195.2@625.11,270.51 P195.2@627.11,270.51 P195.2@628.92,269.24 P195.2@632.73,270.51 P195.2@634.73,270.51 P196.1 P196.2@625.11,265.43 P196.2@627.11,265.43 P196.2@628.92,264.16 P196.2@632.73,265.43 P196.2@634.73,265.43 P197.2@625.11,260.35 P197.2@627.11,260.35 P197.2@628.92,259.08 P197.2@632.73,260.35 P197.2@634.73,260.35 P198.1 P198.2@625.11,255.27 P198.2@627.11,255.27 P198.2@628.92,254 P198.2@632.73,255.27 P198.2@634.73,255.27 P200.1 P200.2@625.11,245.11 P200.2@627.11,245.11 P200.2@628.92,243.84 P200.2@632.73,245.11 P200.2@634.73,245.11 P201.1 P201.2@625.11,240.03 P201.2@627.11,240.03 P201.2@628.92,238.76 P201.2@632.73,240.03 P201.2@634.73,240.03 P202.1 P202.2@625.11,234.95 P202.2@627.11,234.95 P202.2@628.92,233.68 P202.2@632.73,234.95 P202.2@634.73,234.95 P204.2@625.11,224.79 P204.2@627.11,224.79 P204.2@628.92,223.52 P204.2@632.73,224.79 P204.2@634.73,224.79 P205.1 P205.2@625.11,219.71 P205.2@627.11,219.71 P205.2@628.92,218.44 P205.2@632.73,219.71 P205.2@634.73,219.71 P206.1 P206.2@625.11,214.63 P206.2@627.11,214.63 P206.2@628.92,213.36 P206.2@632.73,214.63 P206.2@634.73,214.63 P207.2@625.11,336.55 P207.2@627.11,336.55 P207.2@628.92,335.28 P207.2@632.73,336.55 P207.2@634.73,336.55 P211.1 P219.1 P223.1 P224.1 P225.1 P227.1 P228.1 P235.2@725.17,172.99 P235.2@725.17,174.99 P235.2@725.17,180.61 P235.2@725.17,182.61 P235.2@726.44,176.8 P236.1 P236.2@720.09,172.99 P236.2@720.09,174.99 P236.2@720.09,180.61 P236.2@720.09,182.61 P236.2@721.36,176.8 P237.2@715.01,172.99 P237.2@715.01,174.99 P237.2@715.01,180.61 P237.2@715.01,182.61 P237.2@716.28,176.8 P240.1 P240.2@699.77,172.99 P240.2@699.77,174.99 P240.2@699.77,180.61 P240.2@699.77,182.61 P240.2@701.04,176.8 P241.1 P241.2@694.69,172.99 P241.2@694.69,174.99 P241.2@694.69,180.61 P241.2@694.69,182.61 P241.2@695.96,176.8 P242.1 P242.2@689.61,172.99 P242.2@689.61,174.99 P242.2@689.61,180.61 P242.2@689.61,182.61 P242.2@690.88,176.8 P243.1 P243.2@684.53,172.99 P243.2@684.53,174.99 P243.2@684.53,180.61 P243.2@684.53,182.61 P243.2@685.8,176.8 P244.2@679.45,172.99 P244.2@679.45,174.99 P244.2@679.45,180.61 P244.2@679.45,182.61 P244.2@680.72,176.8 P245.2@674.37,172.99 P245.2@674.37,174.99 P245.2@674.37,180.61 P245.2@674.37,182.61 P245.2@675.64,176.8 P246.2@669.29,172.99 P246.2@669.29,174.99 P246.2@669.29,180.61 P246.2@669.29,182.61 P246.2@670.56,176.8 P247.2@664.21,172.99 P247.2@664.21,174.99 P247.2@664.21,180.61 P247.2@664.21,182.61 P247.2@665.48,176.8 P248.1 P248.2@659.13,172.99 P248.2@659.13,174.99 P248.2@659.13,180.61 P248.2@659.13,182.61 P248.2@660.4,176.8 P249.1 P249.2@654.05,172.99 P249.2@654.05,174.99 P249.2@654.05,180.61 P249.2@654.05,182.61 P249.2@655.32,176.8 P250.1 P250.2@648.97,172.99 P250.2@648.97,174.99 P250.2@648.97,180.61 P250.2@648.97,182.61 P250.2@650.24,176.8 P251.1 P251.2@643.89,172.99 P251.2@643.89,174.99 P251.2@643.89,180.61 P251.2@643.89,182.61 P251.2@645.16,176.8 P252.1 P252.2@638.81,172.99 P252.2@638.81,174.99 P252.2@638.81,180.61 P252.2@638.81,182.61 P252.2@640.08,176.8 P253.1 P253.2@633.73,172.99 P253.2@633.73,174.99 P253.2@633.73,180.61 P253.2@633.73,182.61 P253.2@635,176.8 P254.1 P255.1 P259.1 P260.1 P261.1 P262.1 P267.1 P268.1 P269.1 P270.1 P271.1 P272.1 P275.2@538.75,245.11 P275.2@540.75,245.11 P275.2@542.56,243.84 P275.2@546.37,245.11 P275.2@548.37,245.11 P276.2@538.75,242.57 P276.2@540.75,242.57 P276.2@542.56,241.3 P276.2@546.37,242.57 P276.2@548.37,242.57 P278.1 P278.2@741.95,217.17 P278.2@743.95,217.17 P278.2@747.76,218.44 P278.2@749.57,217.17 P278.2@751.57,217.17 P279.1 P279.2@741.95,222.25 P279.2@743.95,222.25 P279.2@747.76,223.52 P279.2@749.57,222.25 P279.2@751.57,222.25 P280.1 P280.2@741.95,227.33 P280.2@743.95,227.33 P280.2@747.76,228.6 P280.2@749.57,227.33 P280.2@751.57,227.33 P281.1 P281.2@741.95,232.41 P281.2@743.95,232.41 P281.2@747.76,233.68 P281.2@749.57,232.41 P281.2@751.57,232.41 P282.1 P282.2@741.95,237.49 P282.2@743.95,237.49 P282.2@747.76,238.76 P282.2@749.57,237.49 P282.2@751.57,237.49 P283.1 P283.2@741.95,242.57 P283.2@743.95,242.57 P283.2@747.76,243.84 P283.2@749.57,242.57 P283.2@751.57,242.57 P284.1 P284.2@741.95,247.65 P284.2@743.95,247.65 P284.2@747.76,248.92 P284.2@749.57,247.65 P284.2@751.57,247.65 P285.1 P285.2@741.95,252.73 P285.2@743.95,252.73 P285.2@747.76,254 P285.2@749.57,252.73 P285.2@751.57,252.73 P286.1 P286.2@741.95,257.81 P286.2@743.95,257.81 P286.2@747.76,259.08 P286.2@749.57,257.81 P286.2@751.57,257.81 P287.1 P287.2@741.95,262.89 P287.2@743.95,262.89 P287.2@747.76,264.16 P287.2@749.57,262.89 P287.2@751.57,262.89 P288.1 P288.2@741.95,267.97 P288.2@743.95,267.97 P288.2@747.76,269.24 P288.2@749.57,267.97 P288.2@751.57,267.97 P289.1 P289.2@741.95,273.05 P289.2@743.95,273.05 P289.2@747.76,274.32 P289.2@749.57,273.05 P289.2@751.57,273.05 P290.1 P290.2@741.95,278.13 P290.2@743.95,278.13 P290.2@747.76,279.4 P290.2@749.57,278.13 P290.2@751.57,278.13 P291.1 P291.2@741.95,283.21 P291.2@743.95,283.21 P291.2@747.76,284.48 P291.2@749.57,283.21 P291.2@751.57,283.21 P292.1 P292.2@741.95,288.29 P292.2@743.95,288.29 P292.2@747.76,289.56 P292.2@749.57,288.29 P292.2@751.57,288.29 P293.1 P293.2@741.95,293.37 P293.2@743.95,293.37 P293.2@747.76,294.64 P293.2@749.57,293.37 P293.2@751.57,293.37 P294.1 P294.2@741.95,298.45 P294.2@743.95,298.45 P294.2@747.76,299.72 P294.2@749.57,298.45 P294.2@751.57,298.45 P295.1 P295.2@741.95,303.53 P295.2@743.95,303.53 P295.2@747.76,304.8 P295.2@749.57,303.53 P295.2@751.57,303.53 P296.1 P296.2@741.95,308.61 P296.2@743.95,308.61 P296.2@747.76,309.88 P296.2@749.57,308.61 P296.2@751.57,308.61 P301.1 P302.1 P303.1 P304.1 P305.1 P306.1 P307.1 P308.1 P309.1 P310.1 P311.1 P312.1 P313.1 P314.1 P315.1 P316.1 P317.1 P318.1 P319.1
copper on no net:
  other v1: 690.88,184.15

## Text inside footprints (layer, text, board x,y; h text height)
CSC1: Bottom Overlay "1" at 719.94,220.49 h1.27 r90; Bottom Overlay "2" at 722.69,220.74 h1.27 r90; Bottom Overlay "1" at 657.215,277.49 h1.27 r270; Bottom Overlay "2" at 654.565,277.14 h1.27 r270; Bottom Overlay "2" at 715.19,214.24 h1.27 r180; Bottom Overlay "1" at 715.44,211.49 h1.27 r180